# Altium PCB Juno_Light_Driver-Two Drivers Bad.PcbDoc
Units mil, origin at the board's own origin, x right, y up, seen from the top; angles counter-clockwise.
Board outline 2362.2 x 2362.2 mil, 2 copper layers (Top Layer, Bottom Layer); 29 components, 61 nets, 192 pads, 16 vias.
Unrouted connection lines stored in the file: 113.
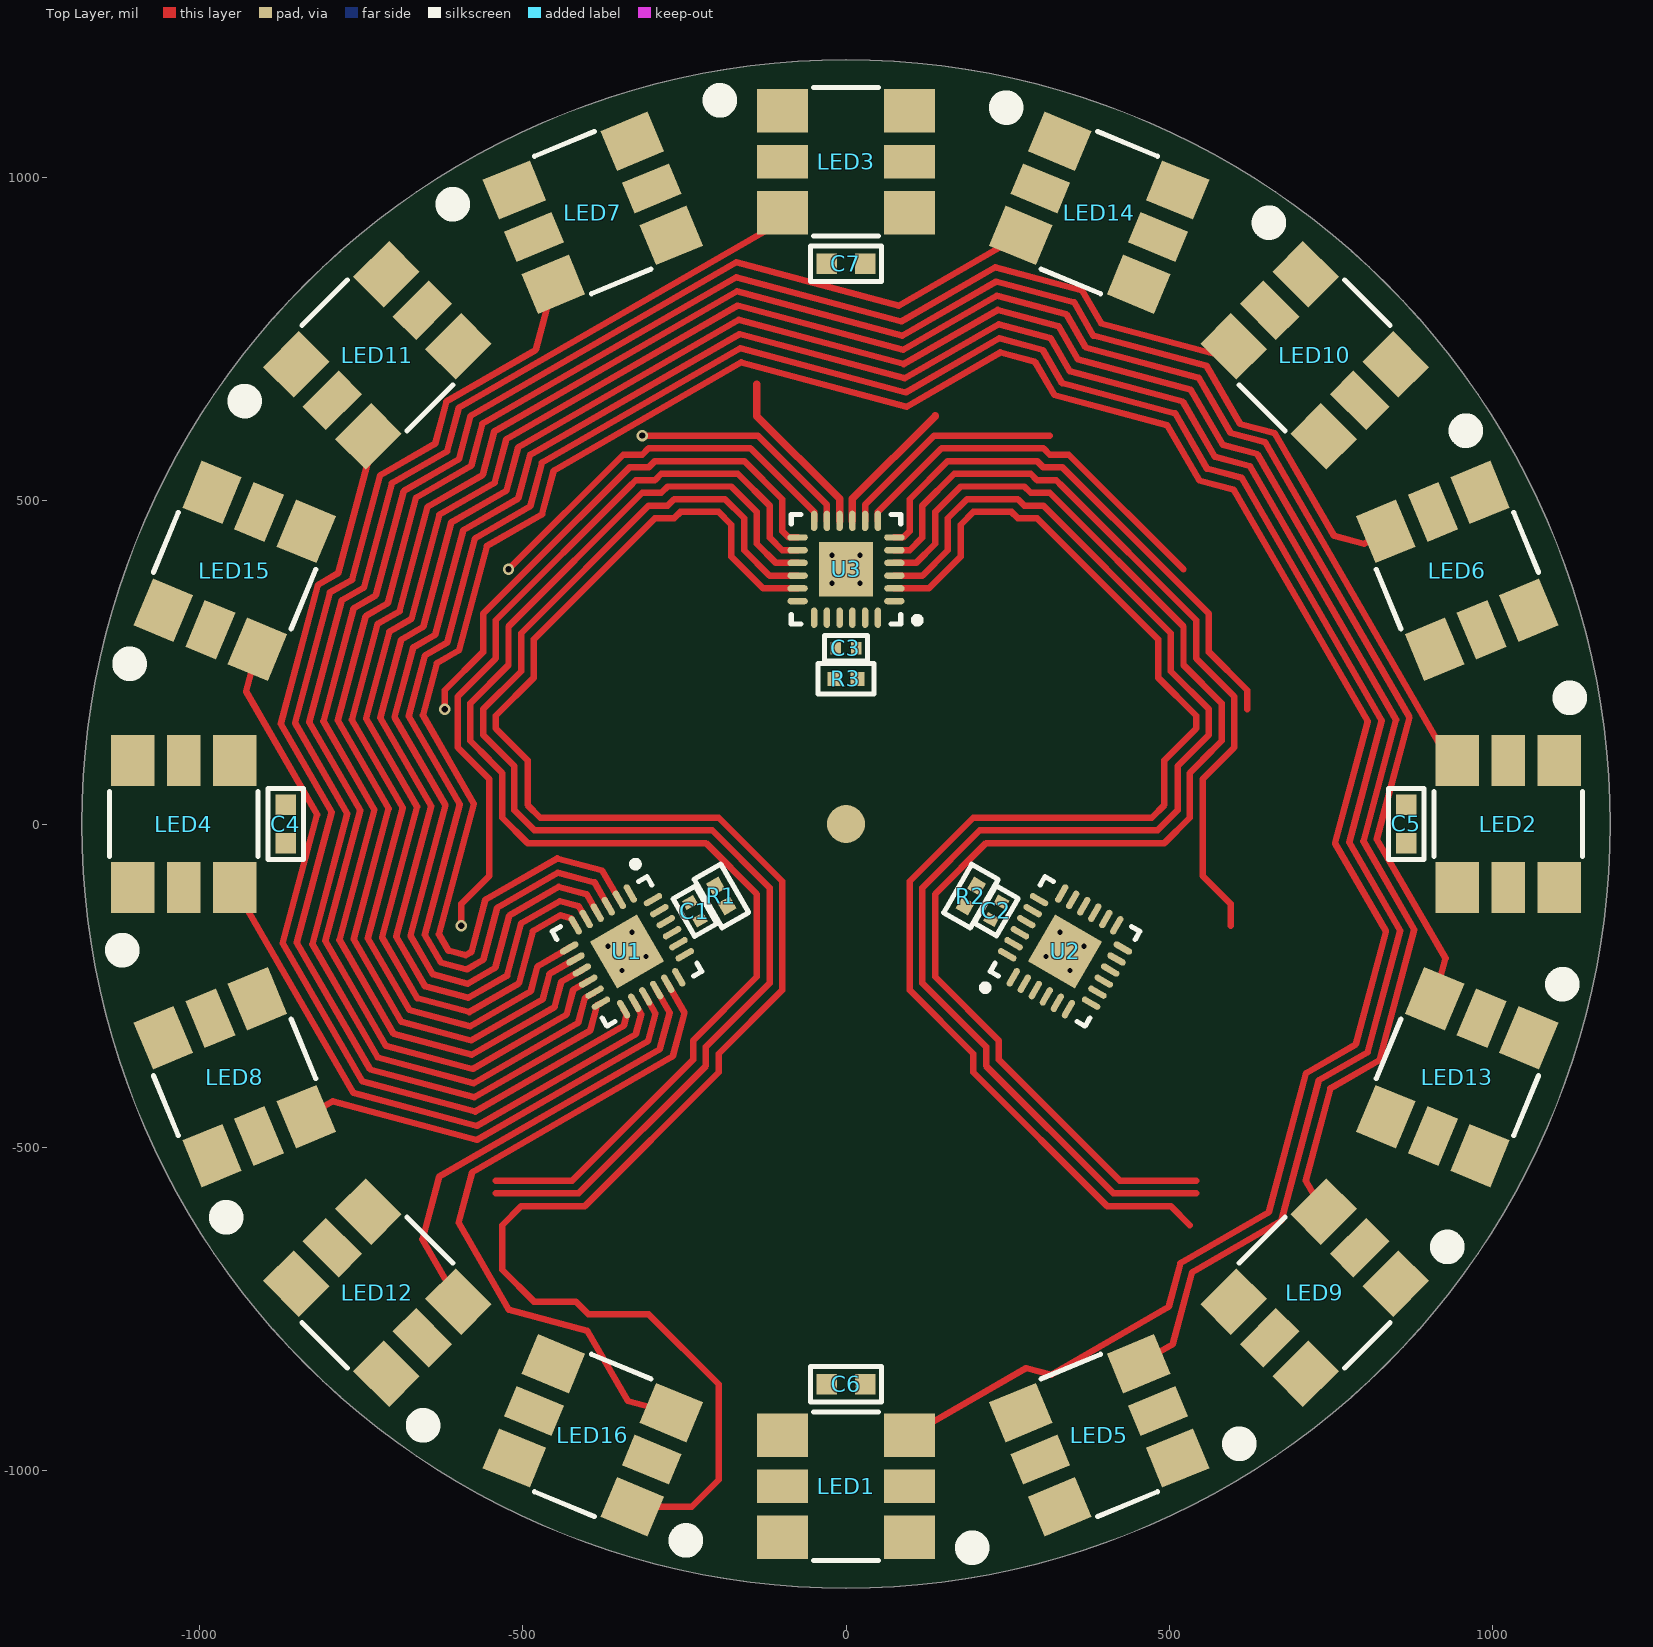
[diagram p0: Top Layer view]
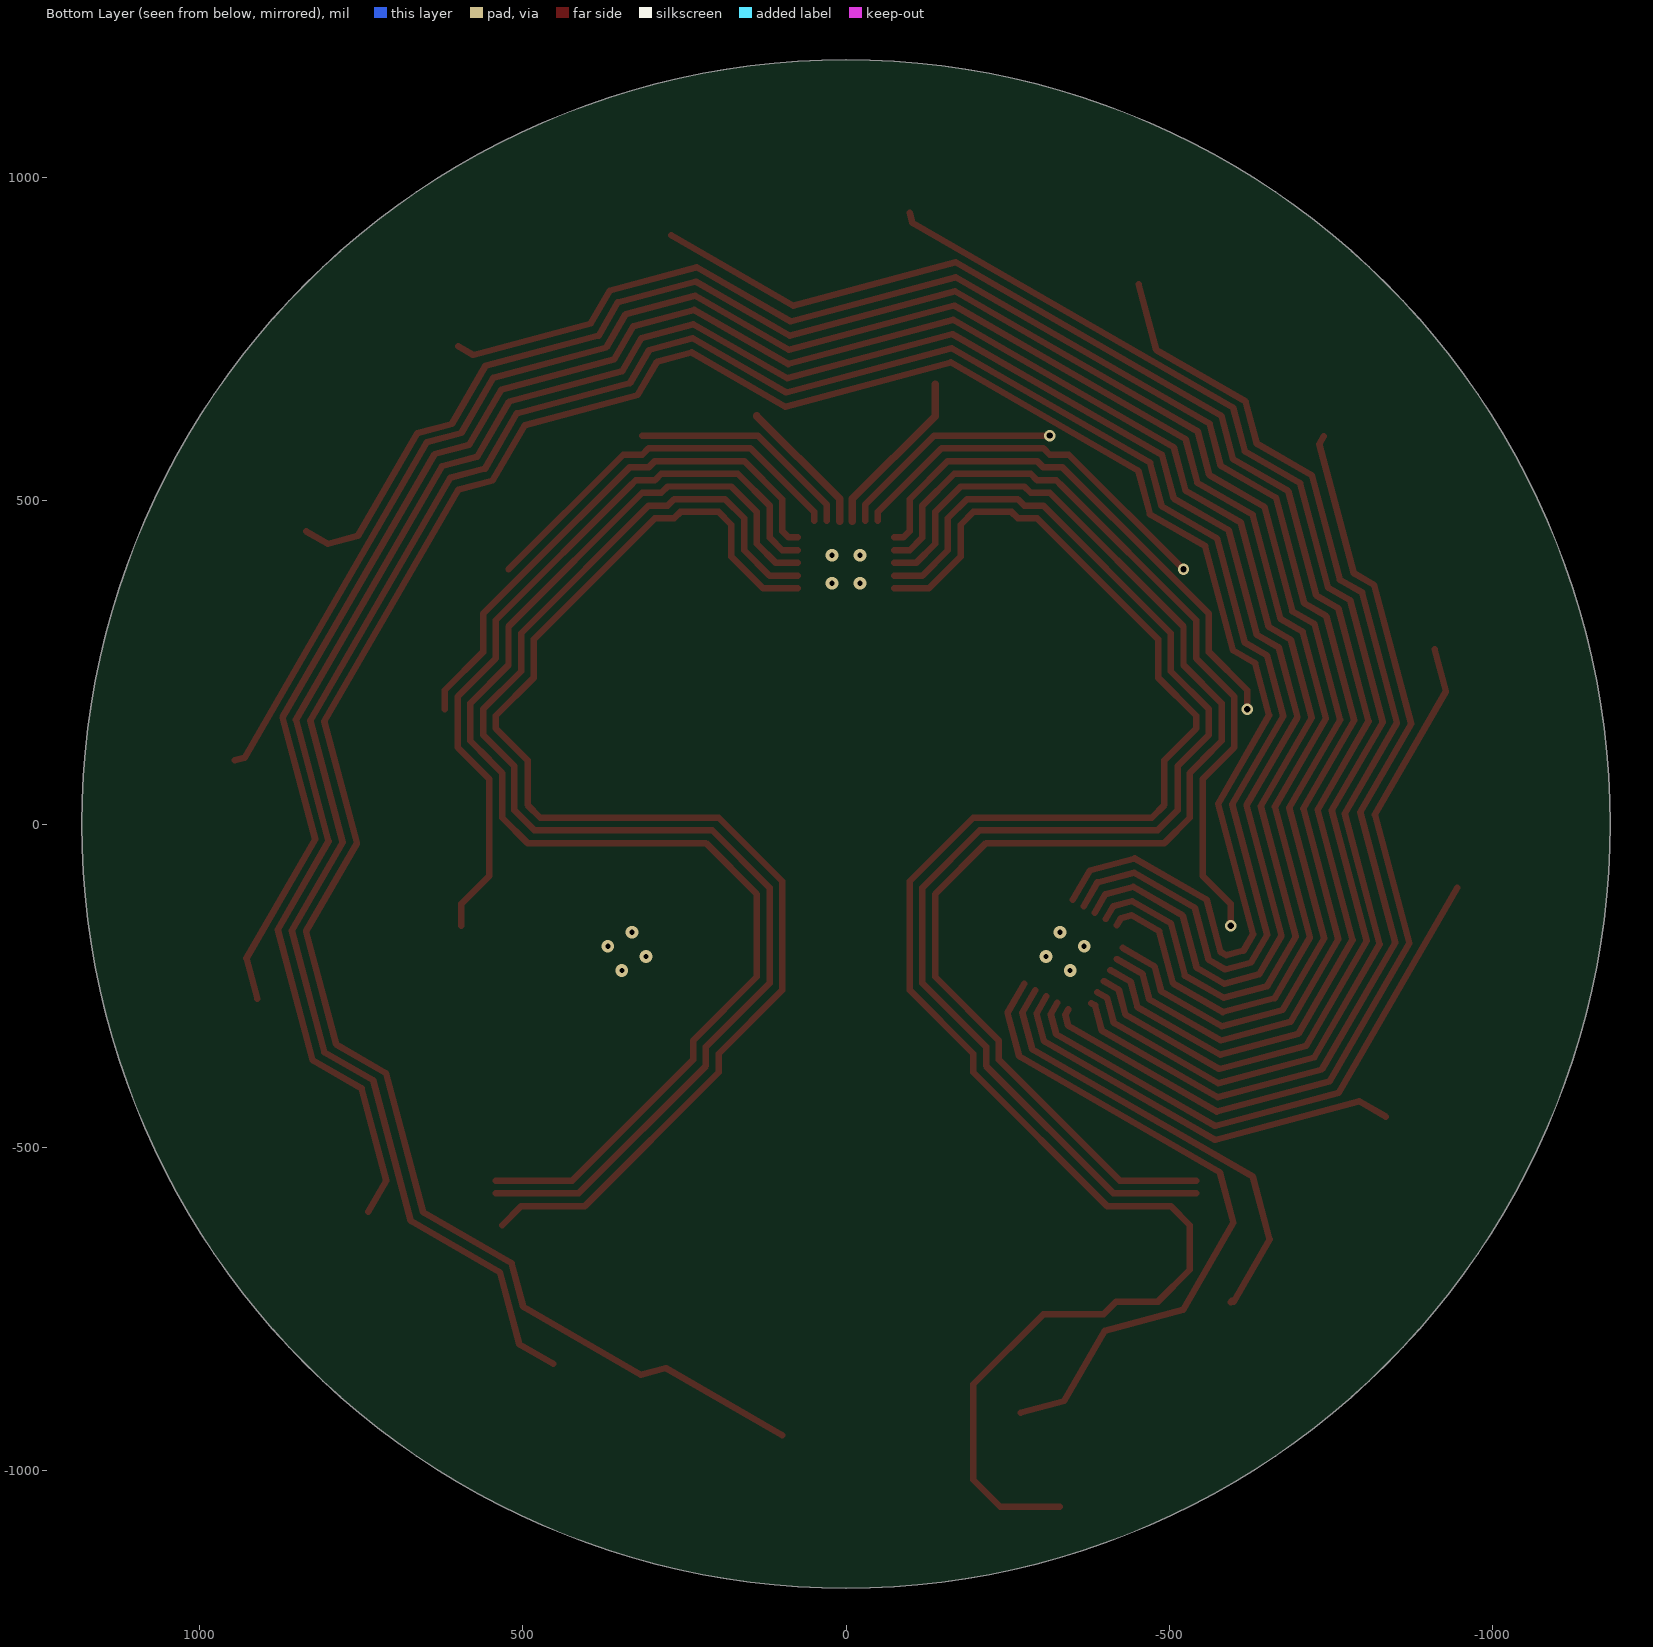
[diagram p1: Bottom Layer view, seen from below]

## Layer stack, top to bottom
Top Solder: solder mask 0.4, Solder Resist, Dk 3.5
Top Layer: signal copper 1.4
Dielectric 1: dielectric 12.6, FR-4, Dk 4.8
Bottom Layer: signal copper 1.4
Bottom Solder: solder mask 0.4, Solder Resist, Dk 3.5

## Board outline
-1181.1,0 ccw(c0,0) 0,-1181.1 ccw(c0,0) 1181.1,0 ccw(c0,0) 0,1181.1 ccw(c0,0)

## Design rules (kind name [scope] priority, off if disabled: settings)
Clearance [All] p1: gap=6 ignorepadtopadclearanceinfootprint=FALSE except(0: Arc-Hole Track-Hole SMDPad-Hole THPad-Hole Via-Hole Fill-Hole Poly-Hole Region-Hole Text-Hole)
MinimumSolderMaskSliver [All] p1 off: minsoldermaskwidth=10
PolygonConnect [All] p1: connectstyle=Direct reliefconductorwidth=10 reliefentries=4 polygonreliefangle="90 Angle" airgapwidth=10
RoutingVias [All] p1: holewidth=28 width=50 viastyle="Through Hole" minholewidth=7.87 minwidth=17.72 maxholewidth=28 maxwidth=50
SilkToSilkClearance [All] p1 off: silktosilkclearance=10
SilkToSolderMaskClearance [IsPad] p1 off: minsilkscreentomaskgap=10 clearancetoexposedcopper=TRUE
SolderMaskExpansion [All] p1: expansion=4
Width [All] p1: maxlimit=200 minlimit=6 preferedwidth=10 minimp=50.000000 maximp=50.000000 favimp=50.000000
27 further rules are at their usual default settings.

## Classes and differential pairs
component class "[02] - TRICOLOR LEDS": C4 C5 C6 C7 LED1 LED2 LED3 LED4 LED5 LED6 LED7 LED8 LED9 LED10 LED11 LED12 LED13 LED14 LED15 LED16
component class "[01] - LED DRIVER": C1 C2 C3 R1 R2 R3 U1 U2 U3

## Components (designator, comment, footprint, x,y, rotation, side; value= is the part's Value field where it differs from the comment)
C1 "0.1uF" C0402 -233.55,-134.84 r120 top
C2 "0.1uF" C0402 232.28,-134.11 r240 top
C3 "0.1uF" C0402 0,271.65 r0 top
C4 "10uF" C0603 -866.14,0 r270 top
C5 "10uF" C0603 866.14,0 r90 top
C6 "10uF" C0603 0,-866.14 r0 top
C7 "10uF" C0603 0,866.14 r180 top
LED1 "SLV6A-FKB-CK1P1G1BB7R3R3" "CREE SLV6A-FKB" 0,-1023.62 r180 top
LED2 "SLV6A-FKB-CK1P1G1BB7R3R3" "CREE SLV6A-FKB" 1023.62,0 r270 top
LED3 "SLV6A-FKB-CK1P1G1BB7R3R3" "CREE SLV6A-FKB" 0,1023.62 r0 top
LED4 "SLV6A-FKB-CK1P1G1BB7R3R3" "CREE SLV6A-FKB" -1023.62,0 r90 top
LED5 "SLV6A-FKB-CK1P1G1BB7R3R3" "CREE SLV6A-FKB" 391.38,-944.88 r202.5 top
LED6 "SLV6A-FKB-CK1P1G1BB7R3R3" "CREE SLV6A-FKB" 944.88,391.38 r292.5 top
LED7 "SLV6A-FKB-CK1P1G1BB7R3R3" "CREE SLV6A-FKB" -391.38,944.88 r22.5 top
LED8 "SLV6A-FKB-CK1P1G1BB7R3R3" "CREE SLV6A-FKB" -944.88,-391.38 r112.5 top
LED9 "SLV6A-FKB-CK1P1G1BB7R3R3" "CREE SLV6A-FKB" 724.41,-724.41 r225 top
LED10 "SLV6A-FKB-CK1P1G1BB7R3R3" "CREE SLV6A-FKB" 724.41,724.41 r315 top
LED11 "SLV6A-FKB-CK1P1G1BB7R3R3" "CREE SLV6A-FKB" -724.41,724.41 r45 top
LED12 "SLV6A-FKB-CK1P1G1BB7R3R3" "CREE SLV6A-FKB" -724.41,-724.41 r135 top
LED13 "SLV6A-FKB-CK1P1G1BB7R3R3" "CREE SLV6A-FKB" 944.88,-391.38 r247.5 top
LED14 "SLV6A-FKB-CK1P1G1BB7R3R3" "CREE SLV6A-FKB" 391.38,944.88 r337.5 top
LED15 "SLV6A-FKB-CK1P1G1BB7R3R3" "CREE SLV6A-FKB" -944.88,391.38 r67.5 top
LED16 "SLV6A-FKB-CK1P1G1BB7R3R3" "CREE SLV6A-FKB" -391.38,-944.88 r157.5 top
R1 "18K" R0402 -192.64,-111.22 r300 top
R2 "18K" R0402 192.91,-111.38 r60 top
R3 "18K" R0402 0,224.41 r180 top
U1 "LED1642GWQTR" QFN24 -338.58,-196.85 r300 top
U2 "LED1642GWQTR" QFN24 338.58,-196.85 r60 top
U3 "LED1642GWQTR" QFN24 0,393.7 r180 top

## Footprints (in the part's own frame and the unit in brackets; to place one, negate y for a bottom-side part, rotate by r counter-clockwise, add the part's x,y. Pads: shape width x height; smd on the part's side, far side on the other; paste and mask are expansions set on the pad)
C0402 [mm] "Chip Capacitor, 2-Leads, Body 1.00x0.50mm, IPC Medium Density"
  rect 0.4x0.5 smd: 1(-0.4,0) 2(0.4,0)
  silkscreen extent -0.85,-0.5 0.85,0.5, body extent -0.52,-0.27 0.53,0.28, height 0.55
C0603 [mm] "Chip Capacitor, 2-Leads, Body 1.60x0.80mm, IPC Medium Density"
  rect 0.8x0.8 smd: 1(-0.75,0) 2(0.75,0)
  silkscreen extent -1.4,-0.7 1.4,0.7, body extent -0.85,-0.45 0.85,0.45, height 0.9
"CREE SLV6A-FKB" [mm]
  rect 2x1.7 smd: 1(-2.5,2) 3(-2.5,-2) 4(2.5,-2) 6(2.5,2)
  rect 2x1.3 smd: 2(-2.5,0) 5(2.5,0)
  silkscreen extent -5.13,-2.92 1.27,2.92, body extent -2.8,-2.8 2.8,2.8, height 2.6
QFN24 [mm] "QFN, 24-Leads, Body 3.93x3.93mm, Pitch 0.50mm, Thermal Pad 2.13x2.13mm, IPC High Density"
  oval 0.8x0.25 smd: 1(-1.9,1.25) 2(-1.9,0.75) 3(-1.9,0.25) 4(-1.9,-0.25) 5(-1.9,-0.75) 6(-1.9,-1.25) 13(1.9,-1.25) 14(1.9,-0.75) 15(1.9,-0.25) 16(1.9,0.25) 17(1.9,0.75) 18(1.9,1.25)
  oval 0.25x0.8 smd: 7(-1.25,-1.9) 8(-0.75,-1.9) 9(-0.25,-1.9) 10(0.25,-1.9) 11(0.75,-1.9) 12(1.25,-1.9) 19(1.25,1.9) 20(0.75,1.9) 21(0.25,1.9) 22(-0.25,1.9) 23(-0.75,1.9) 24(-1.25,1.9)
  rect 2.13x2.13 smd: 25(0,0)
  silkscreen extent -2.92,-2.15 2.15,2.15, body extent -2.05,-2.05 2.05,2.05, height 1
R0402 [mm] "Chip Resistor, 2-Leads, Body 1.00x0.50mm, IPC Medium Density"
  rect 0.55x0.55 smd: 1(-0.45,0) 2(0.45,0)
  silkscreen extent -1.1,-0.6 1.1,0.6, body extent -0.52,-0.28 0.53,0.28, height 0.4

## Part data
C1 C2 C3: library part CL05B104KO5NNNC, "Cap Ceramic 0.1uF 16V X7R 10% SMD 0402 125C C/T", Capacitance=100nF, Case/Package=0402, Case Code (Metric)=1005, Dielectric=X7R, Manufacturer 1=Samsung, Max Operating Temperature=125°C, Min Operating Temperature=-55°C, Package Quantity=1, Supplier Part Number 1=1276-1001-6-ND, Tolerance=10%, Voltage=16V, Case Code (Imperial)=0402, ComponentLink1Description=https://datasheet.ciiva.com/16208/cl05b104kq5nnnc-16208343.pdf, ComponentLink1URL=https://datasheet.ciiva.com/16208/cl05b104kq5nnnc-16208343.pdf, ComponentLink2Description=https://datasheet.ciiva.com/26920/getdatasheetpartid-359683-26920169.pdf, ComponentLink2URL=https://datasheet.ciiva.com/26920/getdatasheetpartid-359683-26920169.pdf, ComponentLink3Description=https://datasheet.ciiva.com/26309/mlcc-catalogdownload2013-eng-26309003.pdf, ComponentLink3URL=https://datasheet.ciiva.com/26309/mlcc-catalogdownload2013-eng-26309003.pdf, ComponentLink4Description=https://datasheet.ciiva.com/29198/458718-da-01-en-vs-kondensator-0402-29198423.pdf, ComponentLink4URL=https://datasheet.ciiva.com/29198/458718-da-01-en-vs-kondensator-0402-29198423.pdf, Contact Plating=Tin, Depth=0.5mm, Description 1="Cap Ceramic 0.1uF 16V X7R 10% SMD 0402 125C Paper T/R", Height=0.5mm, Lead Free="Lead Free", Length=1mm, Manufacturer Part Number 1=CL05B104KO5NNNC, Material=Ceramic, Mount="Surface Mount", Packaging="Tape and Reel", Pricing 1="1=0.1, 10=0.018, 100=0.0081, 500=0.0058, 1000=0.0045, 2500=0.0041, 5000=0.0038 (USD)", Radiation Hardening=No, Stock 1=9531, Supplier 1=Digi-Key, Thickness=0.022inch, Voltage Rating=16V, Voltage Rating (DC)=16V, Width=0.02inch
C4 C5 C6 C7: library part GRM188R61A106KE69D, "Cap Ceramic 10uF 10V X5R 10% SMD 0603 85C Paper T/R", Case/Package=0603, Case Code (Metric)=1608, Dielectric=X5R, Manufacturer=Murata, Max Operating Temperature=85°C, Min Operating Temperature=-55°C, Supplier Part Number 1=490-10474-1-ND, Tolerance=10%, Voltage=10V, Capacitance=10uF, Case Code (Imperial)=0603, Depth=0.8mm, Description 1="Cap Ceramic 10uF 10V X5R 10% SMD 0603 85C Paper T/R", Height=0.8mm, Lead Free="Lead Free", Length=1.6mm, Manufacturer Part Number 1=GRM188R61A106KE69D, Mount="Surface Mount", Packaging="Tape and Reel", Pricing="1=0.22, 10=0.149, 100=0.0754, 500=0.05158, 1000=0.04563 (USD)", REACH SVHC="No SVHC", Stock=40000, Supplier 1=Digi-Key, Thickness=0.037inch, Voltage Rating=10V, Voltage Rating (DC)=10V, Width=0.031inch
LED1 LED2 LED3 LED4 LED5 LED6 LED7 LED8 LED9 LED10 LED11 LED12 LED13 LED14 LED15 LED16: "LED RGB 6PLCC SMD", Case/Package=SMD/SMT, Color=Blue,Green,Red, Forward Voltage=3.2V, Manufacturer=Cree, Supplier Part Number 1=SLV6A-FKB-CK1P1G1BB7R3R3CT-ND, Test Current=20mA, Dominant Wavelength=470nm, Height=2.6mm, Length=5.5mm, Luminous Intensity=420mcd, Manufacturer Part Number=SLV6A-FKB-CK1P1G1BB7R3R3, Mount="Surface Mount", Packaging="Tape and Reel", Pricing 1="1=0.42, 10=0.395, 100=0.3648, 1000=0.32631 (USD)", Stock 1=101474, Supplier 1=Digi-Key, Width=5.3mm
R1 R2 R3: library part CRGCQ0402F18K, Manufacturer="TE Connectivity", Supplier Part Number 1=A129642CT-ND, Manufacturer Part Number=CRGCQ0402F18K, Pricing 1="1=0.1, 10=0.022, 100=0.009, 1000=0.00406, 2500=0.00352, 5000=0.00291 (USD)", Stock 1=128806, Supplier 1=Digi-Key
U1 U2 U3: "IC LED DRIVER LIN DIM 40MA 24QFN", Case/Package=QFN, Frequency=30MHz, Manufacturer=STMicroelectronics, Max Input Voltage=5.5V, Max Operating Temperature=85°C, Max Output Current=50mA, Max Output Voltage=19V, Max Supply Current=10mA, Min Input Voltage=3V, Min Operating Temperature=-40°C, Nominal Input Voltage (DC)=3.3V, Output Current per Channel=40mA, Package Quantity=4000, Supplier Part Number 1=497-14029-1-ND, ComponentLink1Description=http://www.st.com/content/ccc/resource/technical/document/datasheet/ae/9b/e2/7c/7d/66/41/08/DM00080246.pdf/files/DM00080246.pdf/jcr:content/translations/en.DM00080246.pdf?src-supplier=Digi-Key, ComponentLink1URL=http://www.st.com/content/ccc/resource/technical/document/datasheet/ae/9b/e2/7c/7d/66/41/08/DM00080246.pdf/files/DM00080246.pdf/jcr:content/translations/en.DM00080246.pdf?src-supplier=Digi-Key, ComponentLink2Description=https://www.verical.com/server-webapp/html/getDatasheet?partID=789956&src-supplier=Verical, ComponentLink2URL=https://www.verical.com/server-webapp/html/getDatasheet?partID=789956&src-supplier=Verical, ComponentLink3Description=http://www.st.com/web/en/resource/technical/document/datasheet/DM00080246.pdf?src-supplier=Avnet, ComponentLink3URL=http://www.st.com/web/en/resource/technical/document/datasheet/DM00080246.pdf?src-supplier=Avnet, Dimming=PWM, Height=0.95mm, Lead Free="Lead Free", Length=4.15mm, Manufacturer Part Number=LED1642GWQTR, Max Input Voltage (DC)=5.5V, Max Supply Voltage=5.5V, Min Input Voltage (DC)=3V, Min Supply Voltage=3V, Mount="Surface Mount", Nominal Supply Current=10mA, Number of Channels=16, Number of Outputs=16, Number of Pins=24, Operating Supply Voltage=3.3V, Output Current=50mA, Output Voltage=19V, Packaging="Tape and Reel", Pricing 1="1=2.1, 10=1.883, 100=1.5138, 500=1.24372, 1000=1.03052 (USD)", Radiation Hardening=No, REACH SVHC="No SVHC", Stock 1=43999, Supplier 1=Digi-Key, Switching Frequency=30MHz, Width=4.15mm

## Free pads (board coordinates)
  round 59.06 smd: 9(0,0)

## Via types
v1: diameter 19.68, hole 7.87, Top Layer to Bottom Layer, 12 vias
v2: diameter 17.72, hole 9.84, Top Layer to Bottom Layer, tented both sides, 4 vias

## Nets (pads, with @x,y where several pads share a name; then routed paths per layer and width w, separated by ;. In a path a pad name is that pad's centre, name@x,y a point inside that pad or via, vN(x,y) a via of type N, cw(c..) or ccw(c..) an arc to the next point about the centre after c; other vN are vias at no path point)
+3V3: C1.1 C2.1 C3.1 U1.21 U2.21 U3.21
+VBATT: C4.1 C5.1 C6.1 C7.1 LED1.4 LED1.5 LED1.6 LED2.4 LED2.5 LED2.6 LED3.4 LED3.5 LED3.6 LED4.4 LED4.5 LED4.6 LED5.4 LED5.5 LED5.6 LED6.4 LED6.5 LED6.6 LED7.4 LED7.5 LED7.6 LED8.4 LED8.5 LED8.6 LED9.4 LED9.5 LED9.6 LED10.4 LED10.5 LED10.6 LED11.4 LED11.5 LED11.6 LED12.4 LED12.5 LED12.6 LED13.4 LED13.5 LED13.6 LED14.4 LED14.5 LED14.6 LED15.4 LED15.5 LED15.6 LED16.4 LED16.5 LED16.6
CLK: U1.24 U2.24 U3.24
GND: C1.2 C2.2 C3.2 C4.2 C5.2 C6.2 C7.2 R1.1 R2.1 R3.1 U1.22 U1.25 U2.22 U2.25 U3.22 U3.25
  other v1: -346.51,-226.43 346.51,-226.43 -309,-204.78 309,-204.78 -368.16,-188.92 368.16,-188.92 -330.66,-167.27 330.66,-167.27 -21.65,372.05 21.65,372.05 -21.65,415.35 21.65,415.35
LE: U1.1 U2.1 U3.1
NetR1_2: R1.2 U1.20
NetR2_2: R2.2 U2.20
NetR3_2: R3.2 U3.20
NetU1_19: U1.19 U2.23
NetU2_19: U2.19 U3.23
OUTB0: LED1.1 U3.2 | length 2078.7
  Top Layer w10: U3.2 127.95,364.17 177.17,413.39 177.17,462.6 196.85,482.28 255.91,482.28 265.75,472.44 295.28,472.44 482.28,285.43 482.28,226.38 541.34,167.32 541.34,147.64 492.13,98.43 492.13,29.53 472.44,9.84 196.85,9.84 98.42,-88.58 98.42,-256.71 196.85,-355.14 196.85,-383.86 403.54,-590.55 501.97,-590.55 531.5,-620.08
OUTB1: LED5.1 U3.3 | length 2075.6
  Top Layer w10: U3.3 118.11,383.86 157.48,423.23 157.48,472.44 187.01,501.97 265.77,501.97 275.61,492.13 304.74,492.13 501.97,294.9 501.97,236.22 561.02,177.17 561.02,137.8 512.44,89.22 512.44,21.07 481.53,-9.84 206.69,-9.84 118.11,-98.43 118.11,-246.06 216.54,-344.49 216.54,-374.02 413.39,-570.87 541.34,-570.87
OUTB2: LED9.1 U3.4 | length 2076.5
  Top Layer w10: U3.4 108.27,403.54 137.8,433.07 137.8,482.28 177.17,521.65 275.59,521.65 285.43,511.81 314.96,511.81 521.65,305.12 521.65,245.7 580.94,186.41 580.94,128.63 551.18,98.87 551.18,98.43 531.5,78.74 531.5,9.84 492.13,-29.53 216.54,-29.53 137.8,-108.27 137.8,-236.22 236.22,-334.65 236.22,-364.17 423.23,-551.18 541.34,-551.18
OUTB3: LED13.1 U3.5 | length 1173.2
  Top Layer w10: U3.5 98.42,423.23 117.57,442.37 117.57,491.58 167.32,541.34 285.43,541.34 295.28,531.5 324.84,531.5 334.65,521.69 ; 334.65,521.65 541.34,314.96 541.34,255.91 600.22,197.02 600.22,118.41 551.18,69.37 551.18,-80.07 594.47,-123.36 594.47,-157.48
OUTB4: LED2.1 U3.6 | length 833.9
  Top Layer w10: U3.6 88.58,442.91 98.43,452.76 98.43,501.97 157.48,561.02 295.28,561.02 305.12,551.18 334.65,551.18 492.13,393.7 561.02,324.81 561.02,314.95 ; 561.02,314.96 561.02,265.75 620.08,206.69 620.08,177.17
OUTB5: LED6.1 U3.7 | length 604.5
  Top Layer w10: U3.7 49.21,482.28 147.64,580.71 305.12,580.71 314.96,570.87 344.49,570.87 521.65,393.7
OUTB6: LED10.1 U3.8 | length 354.6
  Top Layer w10: U3.8 29.53,493.36 136.56,600.39 314.96,600.39
OUTB7: LED14.1 U3.9 | length 215
  Top Layer w12: U3.9 9.84,502.51 137.8,630.46
OUTB8: LED3.1 U3.10 | length 263.6
  Top Layer w12: -137.8,679.13 -137.8,630.46 -9.84,502.51 U3.10
OUTB9: LED7.1 U3.11 | length 354.6
  Top Layer w10: v2(-314.96,600.39) -136.56,600.39 -29.53,493.36 U3.11
OUTB10: LED11.1 U3.12 | length 604.5
  Top Layer w10: v2(-521.65,393.7) -344.49,570.87 -314.96,570.87 -305.12,580.71 -147.64,580.71 -49.21,482.28 U3.12
OUTB11: LED15.1 U3.13 | length 833.9
  Top Layer w10: v2(-620.08,177.17) -620.08,206.69 -561.02,265.75 -561.02,314.96 -561.02,324.81 -492.13,393.7 -334.65,551.18 -305.12,551.18 -295.28,561.02 -157.48,561.02 -98.43,501.97 -98.43,452.76 -88.58,442.91 U3.13
OUTB12: LED4.1 U3.14 | length 1173.2
  Top Layer w10: v2(-594.47,-157.48) -594.47,-123.36 -551.18,-80.07 -551.18,69.37 -600.22,118.41 -600.22,197.02 -541.34,255.91 -541.34,314.96 -334.65,521.65 ; -334.65,521.69 -324.84,531.5 -295.28,531.5 -285.43,541.34 -167.32,541.34 -117.57,491.58 -117.57,442.37 -98.43,423.23 U3.14
OUTB13: LED8.1 U3.15 | length 2076.5
  Top Layer w10: -541.34,-551.18 -423.23,-551.18 -236.22,-364.17 -236.22,-334.65 -137.8,-236.22 -137.8,-108.27 -216.54,-29.53 -492.13,-29.53 -531.5,9.84 -531.5,78.74 -551.18,98.43 -551.18,98.87 -580.94,128.63 -580.94,186.41 -521.65,245.7 -521.65,305.12 -314.96,511.81 -285.43,511.81 -275.59,521.65 -177.17,521.65 -137.8,482.28 -137.8,433.07 -108.27,403.54 U3.15
OUTB14: LED12.1 U3.16 | length 2075.6
  Top Layer w10: -541.34,-570.87 -413.39,-570.87 -216.54,-374.02 -216.54,-344.49 -118.11,-246.06 -118.11,-98.43 -206.69,-9.84 -481.53,-9.84 -512.44,21.07 -512.44,89.22 -561.02,137.8 -561.02,177.17 -501.97,236.22 -501.97,294.9 -304.74,492.13 -275.61,492.13 -265.77,501.97 -187.01,501.97 -157.48,472.44 -157.48,423.23 -118.11,383.86 U3.16
OUTB15: LED16.1 U3.17 | length 2854.2
  Top Layer w10: LED16.1 -238.37,-1055.29 -196.85,-1013.78 -196.85,-866.14 -305.12,-757.87 -398.17,-757.87 -417.85,-738.19 -482.28,-738.19 -531.5,-688.98 -531.5,-620.08 -501.97,-590.55 -403.54,-590.55 -196.85,-383.86 -196.85,-355.14 -98.43,-256.71 -98.43,-88.58 -196.85,9.84 -472.44,9.84 -492.13,29.53 -492.13,98.43 -541.34,147.64 -541.34,167.32 -482.28,226.38 -482.28,285.43 -295.28,472.44 -265.75,472.44 -255.91,482.28 -196.85,482.28 -177.17,462.6 -177.17,413.39 -127.95,364.17 U3.17
OUTG0: LED1.2 U2.2
OUTG1: LED5.2 U2.3
OUTG2: LED9.2 U2.4
OUTG3: LED13.2 U2.5
OUTG4: LED2.2 U2.6
OUTG5: LED6.2 U2.7
OUTG6: LED10.2 U2.8
OUTG7: LED14.2 U2.9
OUTG8: LED3.2 U2.10
OUTG9: LED7.2 U2.11
OUTG10: LED11.2 U2.12
OUTG11: LED15.2 U2.13
OUTG12: LED4.2 U2.14
OUTG13: LED8.2 U2.15
OUTG14: LED12.2 U2.16
OUTG15: LED16.2 U2.17
OUTR0: LED1.3 U1.2 | length 4387.1
  Top Layer w10: U1.2 -376.55,-72.03 -446.59,-53.26 -557.4,-117.24 -579.01,-197.91 -587.54,-202.83 -614.43,-195.63 -629.19,-170.05 -575.15,31.62 -653.89,168 -632.27,248.67 -598.18,268.36 -554.95,429.7 -469.71,478.91 -451.7,546.14 -161.88,713.46 93.57,645.01 238.78,728.85 292.08,714.57 321.79,663.12 496.57,616.29 545.79,531.05 599.57,516.64 806.26,158.64 755.82,-29.6 834.56,-165.98 787.73,-340.77 711.01,-385.06 653.37,-600.18 516.99,-678.92 498.98,-746.14 316.99,-851.22 278.51,-840.91 LED1.3
OUTR1: LED5.3 U1.3 | length 4128.3
  Top Layer w10: U1.3 -388.68,-90.39 -445.27,-75.23 -539.03,-129.37 -560.64,-210.04 -586.22,-224.8 -626.55,-213.99 -651.16,-171.37 -597.12,30.3 -675.87,166.7 -650.65,260.82 -616.54,280.52 -573.31,441.83 -488.08,491.04 -470.06,558.27 -163.2,735.43 92.25,666.98 237.16,750.64 304.39,732.63 333.91,681.49 508.7,634.65 557.91,549.41 611.69,535 828.23,159.95 777.79,-28.28 856.53,-164.66 806.1,-352.89 730.91,-396.3 672.77,-613.29 534.86,-692.91 505.12,-803.91 LED5.3
OUTR2: LED9.3 U1.4 | length 3862.8
  Top Layer w10: U1.4 -400.81,-108.76 -443.95,-97.2 -520.66,-141.49 -542.28,-222.16 -584.9,-246.77 -638.68,-232.36 -673.13,-172.69 -619.09,28.98 -697.83,165.37 -669.01,272.93 -634.91,292.61 -591.67,453.98 -506.43,503.2 -488.43,570.39 -164.52,757.4 90.94,688.95 235.84,772.61 316.51,751 346.04,699.85 520.83,653.02 ; 520.83,653.02 570.04,567.78 623.82,553.37 850.2,161.27 799.76,-26.96 878.5,-163.34 824.46,-365.02 748.7,-408.76 710.57,-551.06 LED9.3
OUTR3: LED13.3 U1.5 | length 3558.4
  Top Layer w10: U1.5 -412.93,-127.13 -442.63,-119.17 -502.3,-153.62 -523.91,-234.29 -583.58,-268.74 -650.83,-250.72 -695.1,-174.04 -641.06,27.67 -719.81,164.07 -687.39,285.04 -653.28,304.74 -610.05,466.08 -524.81,515.29 -506.8,582.52 -165.84,779.37 89.62,710.92 234.52,794.58 328.64,769.36 358.17,718.22 532.95,671.39 582.17,586.15 635.95,571.74 870.99,164.63 820.55,-23.6 926.66,-207.39 LED13.3
OUTR4: LED2.3 U1.6 | length 3252.2
  Top Layer w10: U1.6 -425.06,-145.49 -441.31,-141.14 -483.93,-165.75 -505.55,-246.42 -582.26,-290.71 -662.93,-269.09 -717.07,-175.33 -663.03,26.35 -741.76,162.71 -705.72,297.19 -671.64,316.87 -628.41,478.21 -543.17,527.42 -525.16,594.65 -167.16,801.34 88.3,732.89 233.2,816.55 340.77,787.73 370.29,736.59 545.08,689.75 594.29,604.51 648.07,590.1 929.58,102.53 LED2.3
OUTR5: LED6.3 U1.7 | length 2983.4
  Top Layer w10: U1.7 -476.81,-219.83 -487.18,-258.54 -580.94,-312.68 -675.06,-287.46 -739.03,-176.65 -685,25.03 -763.74,161.41 -724.11,309.31 -690.01,328.99 -646.78,490.33 -561.54,539.55 -543.53,606.77 -168.48,823.31 86.98,754.86 231.89,838.52 352.89,806.1 382.42,754.95 557.21,708.12 608.99,618.43 662.77,604.02 754.3,445.49 801.14,432.94 LED6.3
OUTR6: LED10.3 U1.8 | length 2678.5
  Top Layer w10: U1.8 -458.44,-231.95 -468.81,-270.67 -579.62,-334.65 -687.18,-305.82 -761,-177.97 -706.96,23.71 -785.7,160.09 -742.47,321.43 -708.38,341.12 -664.65,504.32 -579.41,553.53 -561.89,618.9 -169.8,845.28 85.66,776.83 230.57,860.49 365.02,824.46 394.37,773.62 575.98,724.96 LED10.3
OUTR7: LED14.3 U1.9 | length 2390.8
  Top Layer w10: U1.9 -440.07,-244.08 -450.45,-282.8 -578.3,-356.61 -699.31,-324.19 -782.97,-179.29 -728.93,22.39 -807.67,158.77 -760.84,333.56 -726.74,353.25 -683.51,514.59 -598.27,563.8 -580.26,631.03 -169.5,868.18 81.66,800.88 LED14.3
OUTR8: LED3.3 U1.10 | length 2084.7
  Top Layer w10: U1.10 -421.71,-256.21 -432.08,-294.92 -576.99,-378.58 -711.44,-342.56 -804.94,-180.6 -750.9,21.07 -829.65,157.47 -779.22,345.71 -745.1,365.4 -701.88,526.71 -616.64,575.93 -598.63,643.15 -102.53,929.58 LED3.3
OUTR9: LED7.3 U1.11 | length 1815.9
  Top Layer w10: LED7.3 -479.44,732.73 -617.62,652.95 -635.01,588.05 -720.25,538.84 -763.48,377.5 -797.59,357.8 -851.62,156.16 -770.7,16 -824.74,-185.68 -723.56,-360.92 -575.67,-400.55 -413.73,-307.06 -403.36,-268.34 U1.11
OUTR10: LED11.3 U1.12 | length 1492.4
  Top Layer w10: LED11.3 -731.45,587.23 -784.87,387.88 -815.94,369.94 -873.58,154.82 -794.84,18.44 -848.88,-183.24 -735.69,-379.29 -574.35,-422.52 -395.35,-319.18 -384.97,-280.46 U1.12
OUTR11: LED15.3 U1.13 | length 1213.4
  Top Layer w10: LED15.3 -927.35,204.83 -817.49,14.56 -870.85,-184.56 -747.82,-397.66 -573.03,-444.49 -343.49,-311.96 -338.88,-294.76 U1.13
OUTR12: LED4.3 U1.14 | length 900.2
  Top Layer w10: LED4.3 -761.8,-415.52 -570.5,-466.78 -324.84,-324.96 -316.56,-294.05 U1.14
OUTR13: LED8.3 U1.15 | length 658.3
  Top Layer w10: LED8.3 -793.64,-428.61 -570.39,-488.43 -306.15,-335.87 -294.59,-292.73 U1.15
OUTR14: LED12.3 U1.16 | length 707.6
  Top Layer w10: LED12.3 -654.77,-641.97 -628.74,-544.85 -287.79,-348 -272.62,-291.41 U1.16 ; LED12.3@-596.18,-736.62 LED12.3@-594.47,-739.58
OUTR15: LED16.3 U1.17 | length 1036.1
  Top Layer w10: U1.17 -249.63,-291.87 -267.64,-359.1 -577.79,-538.16 -598.77,-616.45 -521.11,-750.95 -400.11,-783.37 -337.51,-891.8 LED16.3
PWCLK: U1.18 U2.18 U3.18
SDI: U1.23
SDO: U3.19

## Silkscreen, mask and mechanical layers (free items; w line width, h text height)
Mechanical 1:
  circle w39.37: c0,0 r1181.1
Mechanical 2:
  lines w16: -1181.1,0 1181.1,0 ; -1091.2,-451.99 1091.2,451.99 ; -1091.2,451.99 1091.2,-451.99 ; -826.77,-826.77 826.77,826.77 ; -826.77,826.77 826.77,-826.77 ; -451.99,-1091.2 451.99,1091.2 ; -451.99,1091.2 451.99,-1091.2 ; 0,-1181.1 0,1181.1
Mechanical 3:
  lines w16: -1022.86,-590.55 0,0 ; 0,1181.1 0,0 ; 1022.86,-590.55 0,0
Mechanical 4:
  lines w16: -1181.1,0 1181.1,0 ; 0,-1181.1 0,1181.1